# Altium PCB BreakoutBoard.PcbDoc
Units mil, origin at the board's own origin, x right, y up, seen from the top; angles counter-clockwise.
Board outline 1880 x 1880 mil, 2 copper layers (Top Layer, Bottom Layer), stack 61.811 mil thick; 15 components, 19 nets, 70 pads, 7 vias.
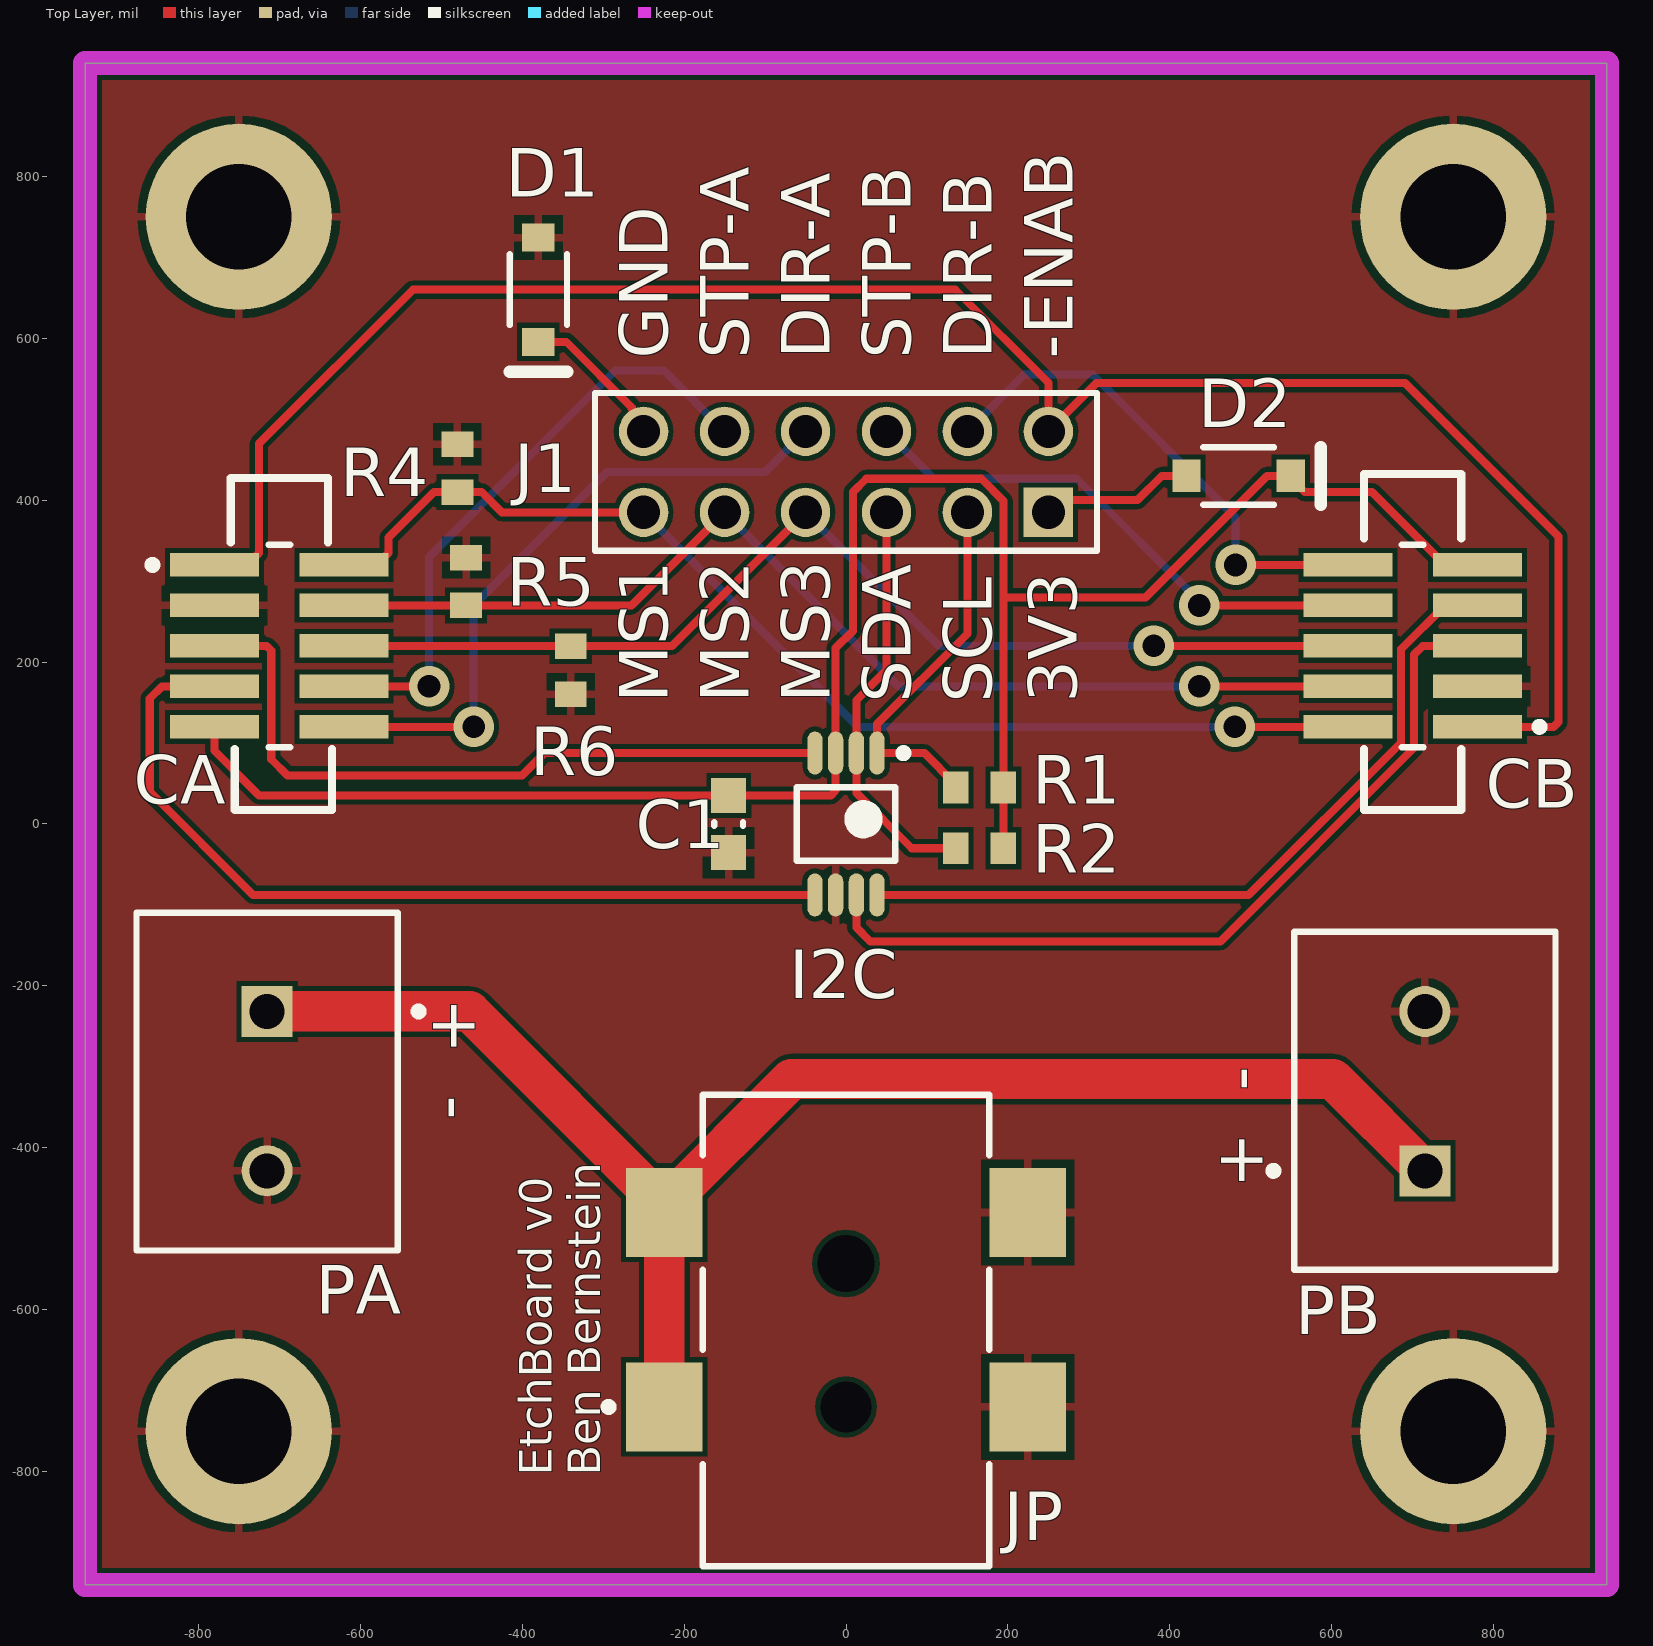
[diagram p0: Top Layer view]
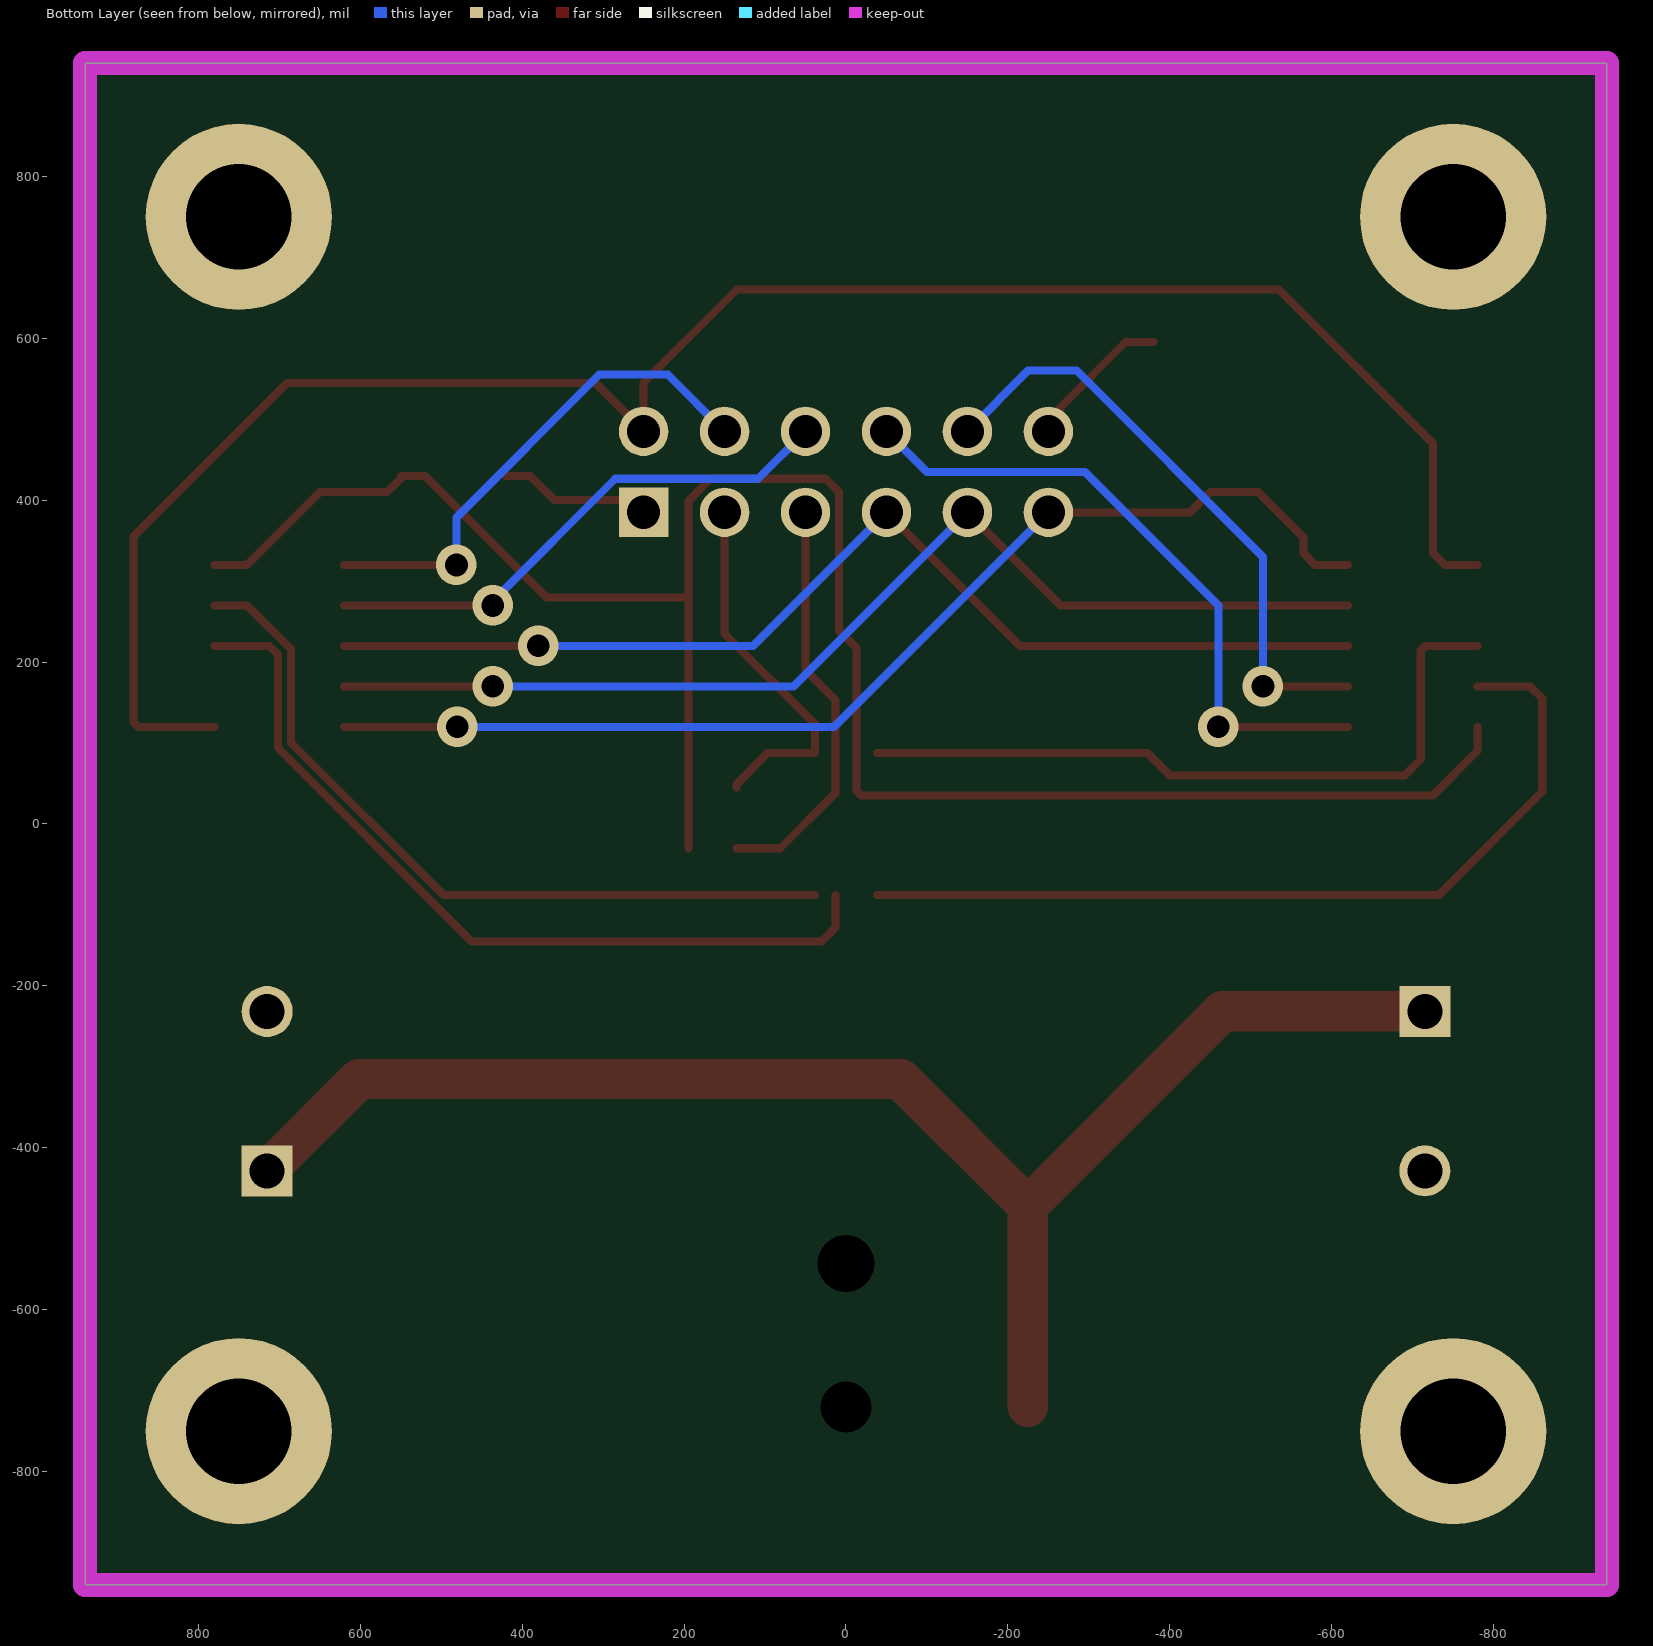
[diagram p1: Bottom Layer view, seen from below]

## Layer stack, top to bottom
Top Solder: solder mask 0.3937, Solder Resist, Dk 3.5
Top Layer: signal copper 1.378
Dielectric 1: dielectric 59.0551, FR-4, Dk 4.8
Bottom Layer: signal copper 1.378
Bottom Solder: solder mask 0.3937, Solder Resist, Dk 3.5

## Board outline
-940,-940 -940,940 940,940 940,-940

## Design rules (kind name [scope] priority, off if disabled: settings)
AcuteAngle [All] p1: minimum=6.00000000000000E+0001 checktracksonly=FALSE
AssemblyTestPointUsage [All] p1: allowmultiple=TRUE
AssemblyTestpoint [All] p1: testpointundercomponent=TRUE minsize=30 maxsize=100 preferedsize=60 minholesize=0 maxholesize=40 preferedholesize=32 testpointgrid=1 usegrid=FALSE gridtolerance=0.01 allowsidebottom=TRUE
BoardOutlineClearance [All] p1: gap=10 ignorepadtopadclearanceinfootprint=FALSE except(100: SMDPad-OutlineEdge SMDPad-CavityEdge SMDPad-CutoutEdge THPad-OutlineEdge THPad-CavityEdge THPad-CutoutEdge)
Clearance [All] p1: gap=6 ignorepadtopadclearanceinfootprint=FALSE except(120: SMDPad-THPad)
FabricationTestPointUsage [All] p1: valid=0 allowmultiple=TRUE
FabricationTestpoint [All] p1: side=2 testpointundercomponent=TRUE minsize=30 maxsize=100 preferedsize=60 minholesize=0 maxholesize=40 preferedholesize=32 testpointgrid=1 allowsidebottom=TRUE usegrid=FALSE gridtolerance=0.01
HoleSize [All] p1: absolutevalues=TRUE maxlimit=100 minlimit=8 maxpercent=80.000 minpercent=20.000
MinimumAnnularRing [All] p1: minimumring=6
MinimumSolderMaskSliver [All] p1: minsoldermaskwidth=4
PlaneClearance [All] p1: clearance=10
PolygonConnect [All] p1: connectstyle=Relief reliefconductorwidth=10 reliefentries=4 polygonreliefangle="90 Angle" airgapwidth=10
RoomDefinition BreakoutBoard [InComponentClass('BreakoutBoard')] p1: confinementstyle=ConfineIn formatcopy=TRUE lockcomponents=FALSE outline -1010,-1015 1005,-1015 1005,1045 -1010,1045
RoutingVias [All] p1: holewidth=16 width=30 viastyle="Through Hole" minholewidth=8 minwidth=20 maxholewidth=30 maxwidth=50
SMDEntry [All] p1: side=TRUE corner=TRUE anyangle=FALSE
SMDNeckDown [All] p1: percent=75.000
SMDToCorner [All] p1: distance=0
SMDToPlane [All] p1: distance=0
SilkToSilkClearance [All] p1: silktosilkclearance=0
SilkToSolderMaskClearance [IsPad] p1: minsilkscreentomaskgap=0 clearancetoexposedcopper=TRUE
SolderMaskExpansion [All] p1: expansion=4 istentingtop=FALSE
UnRoutedNet [All] p1: checkbadconnections=TRUE
Width [All] p1: maxlimit=1000 minlimit=6 preferedwidth=10
20 further rules are at their usual default settings.

## Components (designator, comment, footprint, x,y, rotation, side; value= is the part's Value field where it differs from the comment)
C1 "CAP 100nF 10V 0603(1608)" CAPC0603(1608)100_M -145,0 r270 top value=100nF
CA "FTSH-105-01-F-DV-K" SMTC-FTSH-105-01-L-DV-K_V -700,220 r270 top
CB "FTSH-105-01-F-DV-K" SMTC-FTSH-105-01-L-DV-K_V 700,220 r90 top
D1 "MBR0540" FAIR-SOD123-2_V -380,660 r270 top
D2 "MBR0540" FAIR-SOD123-2_V 485,430 r0 top
I2C "PCA9540BDP,118" TSOP65P490X110-8N 0,0 r270 top
J1 "SSW-106-01-T-D" SMTC-SSW-106-01-X-D 250,385 r180 top
JP "PJ-002BH-SMT-TR" CUI-PJ-002BH-SMT_V 0,-600 r90 top
PA "282836-2" TECO-282836-2_V -715,-330 r270 top
PB "282836-2" TECO-282836-2_V 715,-330 r90 top
R1 "RC0603FR-07100KL" RESC1608X55X25ML10T15 165,45 r180 top
R2 "RC0603FR-07100KL" RESC1608X55X25ML10T15 165,-30 r180 top
R4 "RC0603FR-07100KL" RESC1608X55X25ML10T15 -480,439.53 r270 top
R5 "RC0603FR-07100KL" RESC1608X55X25ML10T15 -469.25,299.53 r270 top
R6 "RC0603FR-07100KL" RESC1608X55X25ML10T15 -340,190 r90 top

## Footprints (in the part's own frame and the unit in brackets; to place one, negate y for a bottom-side part, rotate by r counter-clockwise, add the part's x,y. Pads: shape width x height; smd on the part's side, far side on the other; paste and mask are expansions set on the pad)
CAPC0603(1608)100_M [mm] "Chip Capacitor, Body 1.6x0.8mm, Height 1.0mm, IPC Low Density"
  rect 1.1x1.1 smd: 1(-0.9,0) 2(0.9,0)
  silkscreen extent -0.05,-0.45 0.05,0.45, body extent -0.87,-0.47 0.88,0.48, height 1
CUI-PJ-002BH-SMT_V [mm] "SMD, 3-Leads, Body 9x14.8mm, Pitch 6.1mm"
  rect 2.8x2.4 smd: 1(-3.05,5.7) 1(3.05,5.7) 2(-3.05,-5.7) 3(3.05,-5.7)
  round 0 hole 1.6 unplated: MH1(-3.05,0)
  round 0 hole 1.8 unplated: MH2(1.45,0)
  silkscreen extent -8.05,-4.5 6.75,7.57, body extent -8.05,-6.3 6.75,6.3, height 11.2
FAIR-SOD123-2_V [mm] "SOD123, 2-Leads, Body 1.80x2.85mm"
  rect 0.88x1.02 smd: 1(-1.635,0) 2(1.635,0)
  silkscreen extent -1.11,-0.9 2.58,0.9, body extent -1.43,-0.9 1.42,0.9, height 1.28
RESC1608X55X25ML10T15 [mm] "Chip Resistor, 2-Leads, Body 1.60x0.80mm, IPC Low Density"
  rect 0.8x1 smd: 1(-0.75,0) 2(0.75,0)
  body extent -0.85,-0.45 0.85,0.45, height 0.55
SMTC-FTSH-105-01-L-DV-K_V [mm] "CONN, 10-Leads, Body 6.35x3.43mm, Pitch 1.27mm"
  rect 0.74x2.79 smd: 1(-2.54,-2.035) 2(-2.54,2.035) 3(-1.27,-2.035) 4(-1.27,2.035) 5(0,-2.035) 6(0,2.035) 7(1.27,-2.035) 8(1.27,2.035) 9(2.54,-2.035) 10(2.54,2.035)
  silkscreen extent -3.17,-4.1 3.17,0.34, body extent -3.17,-2.92 3.18,2.92, height 6.12
SMTC-SSW-106-01-X-D [mm] "SQ Post Socket, 2x6 Pins, Vertical, 2.54mm Pitch, Female"
  rect 1.55x1.55 hole 1.04: 1(0,0)
  round 1.55 hole 1.04: 2(0,-2.54) 3(2.54,0) 4(2.54,-2.54) 5(5.08,0) 6(5.08,-2.54) 7(7.62,0) 8(7.62,-2.54) 9(10.16,0) 10(10.16,-2.54) 11(12.7,0) 12(12.7,-2.54)
  silkscreen extent -1.53,-3.74 14.23,1.2, body extent -1.52,-3.75 14.22,1.21, height 8.51
TECO-282836-2_V [mm] "Female Header, Pitch 5mm, 1 x 2 Position, Height 10mm"
  rect 1.6x1.6 hole 1.1: 1(-2.5,0)
  round 1.6 hole 1.1: 2(2.5,0)
  silkscreen extent -5.6,-4.1 5,4.88, body extent -5.6,-4.1 5,4.1, height 10
TSOP65P490X110-8N [mm] "TSOP, 8-Leads, Body 3.00x3.00mm, Pitch 0.65mm, IPC Medium Density"
  oval 1.35x0.48 smd: 1(-2.225,0.975) 2(-2.225,0.325) 3(-2.225,-0.325) 4(-2.225,-0.975) 5(2.225,-0.975) 6(2.225,-0.325) 7(2.225,0.325) 8(2.225,0.975)
  silkscreen extent -2.35,-1.55 1.15,1.92, body extent -1.55,-1.55 1.55,1.55, height 1.1

## Part data
C1: library part CMP-1035-02580-1, "CAP 100nF 10V ±10% 0603 (1608 Metric) Thickness 1mm SMD", Case-EIA=0603, Case-Metric=1608, Rated Voltage="10 V", Tolerance=Â±10%, Max Thickness="1 mm", Technology=SMT
CA CB: library part CMP-2000-05352-1, "Male Header, Pitch 1.27 mm, 2 x 5 Position, Height 6.12 mm, RoHS, Tube", Color=Black, Manufacturer=Samtec, Package Description="Male Header, Pitch 1.27 mm, 2 x 5 Position, Height 5.97 mm, Tail Length 4.32 mm", Package Reference=FTSH-105-01-L-DV-K, Category=Connectors,Interconnects, Connector Type=Header,Shrouded, Contact Finish=Gold, Contact Finish Thickness=3µin(0.08µm), Contact Mating Length="0.120\"(3.05mm)", Contact Type=MalePin, Datasheet URL=http://suddendocs.samtec.com/prints/ftsh-1xx-xx-xxx-dv-xxx-mkt.pdf, Datasheet Version="Rev. ET, 10/1995", Family=RectangularConnectors-Headers,MalePins, Fastening Type=-, Features=-, Manufacturer URL=http://www.samtec.com/, Mounting Type=SurfaceMount, Number of Positions=10, Number of Positions Loaded=All, Number of Rows=2, Package URL=http://suddendocs.samtec.com/prints/ftsh-1xx-xx-xxx-dv-xxx-footprint.pdf, Packaging=Tube, Pitch="0.050\"(1.27mm)", Row Spacing="0.050\"(1.27mm)", Series=FTSH, System=Connector, Termination=Solder
D1 D2: library part CMP-2000-05114-1, "Schottky Rectifier, 40 V, 0.5 A, 2-Pin SOD-123, RoHS, Tape and Reel", Capacitance @ Vr, F=-, Current - Average Rectified (Io)=500mA, Current - Reverse Leakage @ Vr=20µA@40V, Manufacturer=Fairchild, Operating Temperature - Junction=-65degC~125degC, Package / Case=SOD-123, Standard Package=1, Voltage - DC Reverse (Vr) (Max)=40V, Voltage - Forward (Vf) (Max) @ If=510mV@500mA, Category=DiscreteSemiconductorProducts, Datasheet URL=https://datasheet.ciiva.com/8303/mbr0540-8303808.pdf, Datasheet Version="Rev. 1.1.0, 10/2014", Diode Type=Schottky, Family=Diodes,Rectifiers-Single, Manufacturer URL=https://www.fairchildsemi.com/, Mounting Type=SurfaceMount, Online Catalog=SchottkyDiode, Other Names=MBR0540CT, Packaging=CutTape(CT), Reverse Recovery Time (trr)=-, Series=-, Speed=FastRecovery=200mA(Io), Supplier Device Package=SOD-123
I2C: library part CMP-00893-4, "IC I2C MUX 2CH 8-TSSOP", Case/Package=TSSOP, Max Frequency=400kHz, Max Operating Temperature=85°C, Max Power Dissipation=400mW, Max Supply Voltage=5.5V, Min Operating Temperature=-40°C, Min Supply Voltage=2.3V, Nominal Supply Current=100mA, On-State Resistance=55R, Package Quantity=1, Quiescent Current=65uA, Contact Plating=Gold, Height=0.95mm, Interface=I2C, Lead Free="Lead Free", Length=3.1mm, Logic Function=Multiplexer, Mount="Surface Mount", Number of Channels=2, Number of Circuits=2, Number of Input Lines=1, Number of Inputs=2, Number of Output Lines=2, Number of Outputs=1, Number of Pins=8, Packaging="Tape and Reel", Power Dissipation=400mW, Propagation Delay=0.3ns, Radiation Hardening=No, Width=3.1mm
J1: library part CMP-1023-00356-1, "SQ Post Socket, Through-hole, Vertical, -55 to 105 degC, 2.54mm Pitch, 12-Pin, Female, RoHS", Manufacturer=Samtec, Temperature Range="-55 to 105 degC", ComponentLink1Description="Manufacturer URL", ComponentLink1URL=http://www.samtec.com, ComponentLink2Description=Datasheet, ComponentLink2URL=http://www.samtec.com/documents/webfiles/pdf/SSW_TH.PDF, ComponentLink3Description="Package Specification", ComponentLink3URL=http://www.samtec.com/documents/webfiles/cpdf/SSW-1XX-XX-XXX-X-XX-XXX-XX-MKT.pdf, DatasheetVersion=F-214, Mounting Technology=Through-hole, Orientation=Vertical, PackageDescription="Assembly, Socket Strip .016 X .031 Tail", PackageReference=SSW-106-01-X-D, PackageVersion="CA, 6/1987", PartNumber=SSW-106-01-T-D, Pitch="2.54 mm", RoHS=True
JP: library part CMP-2000-06897-1, "DC Power Jack, 24 V, -25 to 85 degC, 3-Pin SMD, RoHS, Bulk", Current Rating=5A, Flammability Rating=UL94V-0, Insulation Resistance=100MOhms, Manufacturer=CUIInc., Operating Temperature Range=-25Cto+85C, Package Description="3-Pin Surface Mount Device, Body 9 x 14.8 mm, Pitch 6.1 mm", Package Reference=PJ-002BH-SMT, Voltage Rating=24V, Brand=CUI, Connector Type=DCPowerJack, Contact Gender=Male, Contact Material=Brass, Contact Plating=Nickel, Datasheet URL=http://www.cui.com/product/resource/pj-002bh-smt.pdf, Datasheet Version="Rev. 1.05, 05/2016", Factory Pack Quantity=350, Housing Material=Polyamide(PA), Inside Contact Diameter=2.5mm, Manufacturer URL=http://www.cui.com/, Mounting Angle=Right, Mounting Style=SMD/SMT, Mounting Technology=SurfaceMount, Outside Contact Diameter=6.5mm, Packaging=Reel, Product=Jacks, Product Category=DCPowerConnectors, RoHS=True, Termination Style=SMD/SMT
PA PB: library part CMP-1684-00017-1, "Female Header, Pitch 5 mm, 1 x 2 Position, Height 10 mm, Tail Length 3.5 mm, Rohs, Bulk", Color=Green, Current=13.5A, Manufacturer="TE Connectivity", Package Description="Female Header, Pitch 5 mm, 1 x 2 Position, Height 10 mm, Tail Length 3.5 mm", Package Reference=THD, Standard Package=300, Voltage=300V, 3D Model=282836-2.pdf, Category=Connectors,Interconnects, Clamp Material - Plating=Brass-NickelPlated, Contact Material - Plating=Brass-TinPlated, Datasheet URL=http://www.te.com.cn/commerce/DocumentDelivery/DDEController?Action=showdoc&DocId=Catalog+Section%7F1308389_EUROSTYLE_TERMINAL_BLOCKS%7F0607%7Fpdf%7FEnglish%7FENG_CS_1308389_EUROSTYLE_TERMINAL_BLOCKS_0607.pdf%7F282836-2, Dynamic Catalog=BuchananSeries, Family=TerminalBlocks-WiretoBoard, Featured Product=EurostyleTerminalBlockConnectors, Features=Interlocking(Side), Housing Material=Polyamide(PA66),Nylon6/6, Manufacturer URL=http://www.te.com, Mating Orientation=HorizontalwithBoard, Mounting Type=ThroughHole, Number of Levels=1, Other Names="5ULV-02B / A98076", Packaging=Bulk, Pitch="0.197\"(5.00mm)", Positions Per Level=2, Product Training Modules=Wire-to-BoardEurostyleTerminalBlocks, RoHS Information=282836-2StatementofCompliance, Screw Material - Plating=Brass-NickelPlated, Screw Thread=M3, Series=Buchanan, System=Connector, Torque - Screw=0.68Nm(6Lb-In), Wire Gauge=16-30AWG, Wire Termination=Screw-RisingCageClamp
R1 R2 R4 R5 R6: library part CMP-2100-03662-1, "Chip Resistor, 100 KOhm, +/- 1%, 0.1 W, -55 to 155 degC, 0603 (1608 Metric), RoHS, Tape and Reel", Case Code (Imperial)=0603, Case Code (Metric)=1608, Manufacturer=Yageo, Max Operating Temperature=155degC, Min Operating Temperature=-55degC, Package Description="2-Pin Surface Mount Device, Body 1.6 x 0.8 mm", Power Rating=100mW, Resistance=100KOhm, Temperature Coefficient=100ppm/degreesC, Tolerance=1%, Voltage Rating=50V, Case/Package=0603, Composition=ThickFilm, Datasheet URL=http://www.yageo.com/NewPortal/yageodocoutput?fileName=/pdf/R-Chip/PYu-RC_Group_51_RoHS_L_5.pdf, Datasheet Version="Rev. 5, 10/2016", Depth=0.8mm, Height=0.45mm, Lead Free=LeadFree, Length=1.6mm, Manufacturer URL=http://www.yageo.com/, Military Standard=Not, Number of Pins=2, Package Reference=0603, Packaging=TapeandReel, REACH SVHC=NoSVHC, RoHSCompliant=true, Termination=SMD/SMT, Voltage Rating (DC)=50V, Width=0.8mm

## Free pads (board coordinates)
  round 230 hole 130: 25(-750,-750) 25(-750,750) 25(750,-750) 25(750,750)

## Via types
v1: diameter 50, hole 28, Top Layer to Bottom Layer, 7 vias

## Nets (pads, with @x,y where several pads share a name; then routed paths per layer and width w, separated by ;. In a path a pad name is that pad's centre, name@x,y a point inside that pad or via, vN(x,y) a via of type N, cw(c..) or ccw(c..) an arc to the next point about the centre after c; other vN are vias at no path point)
3V3: C1.1 CA.9 CB.9 D2.2 I2C.3 R1.1 R2.1 | length 2525.1
  Top Layer w10: CA.9 -780.12,90.43 -725.12,35.43 -18.65,35.43 -12.8,41.29 -12.8,217.28 8.49,238.56 8.49,410 25,426.51 167.19,426.51 194.53,399.18 194.53,280 ; R2.1 R1.1 194.53,280 ; D2.2@549.37,427.24 566.69,409.92 649.84,409.92 739.76,320 CB.9 ; D2.2 520,430 370,280 194.53,280
-ENABLE: CA.1 CB.1 J1.2 | length 2421.1
  Top Layer w10: CA.1 -739.76,320 -725.2,334.57 -725.2,469.8 -535,660 135,660 250,545 J1.2 ; J1.2@250.94,485.94 309.53,544.53 625,544.53 690.47,544.53 880,355 880,125.86 874.14,120 CB.1
DIR-A: CA.10 J1.8 | length 808.9
  Top Layer w10: CA.10 v1(-460,120)
  Bottom Layer w10: v1(-460,120) -460,270 -295,435 -100,435 J1.8
DIR-B: CB.10 J1.4 | length 630.7
  Top Layer w10: v1(481.22,320) CB.10
  Bottom Layer w10: J1.4 220,555 305,555 481.22,378.78 v1(481.22,320)
GND: C1.2 CA.3 CB.3 D1.1 I2C.6 JP.2 JP.3 PA.2 pad.25 PB.2 R4.1 R5.1 R6.1
MS1: CA.2 CB.2 J1.11 R4.2 | length 1408.5
  Top Layer w10: CA.2 -579.53,320 -564.96,334.57 -564.96,353.87 -508.83,410 R4.2 -450,410 -425,385 J1.11 ; v1(480,120) CB.2
  Bottom Layer w10: J1.11 15,120 v1(480,120)
MS2: CA.4 CB.4 J1.9 R5.2 | length 1376.5
  Top Layer w10: CA.4 R5.2 -265,270 J1.9 ; v1(436.22,170) CB.4
  Bottom Layer w10: J1.9 65,170 v1(436.22,170)
MS3: CA.6 CB.6 J1.7 R6.2 | length 1376.5
  Top Layer w10: CA.6 -215,220 J1.7 ; v1(380,220) CB.6
  Bottom Layer w10: J1.7 115,220 v1(380,220)
PI3V3: D2.1 J1.1 | length 189.3
  Top Layer w10: J1.1 265,400 360,400 390,430 D2.1
PIGND: D1.2 J1.12 | length 184.6
  Top Layer w10: D1.2 -345.63,595.63 -264.68,514.68 -264.68,513.49 -250,498.81 J1.12
SCL: I2C.1 J1.3 R1.2 | length 460.7
  Top Layer w10: R1.2 135.47,48.94 96.81,87.6 I2C.1 38.39,123.39 150,235 J1.3
SCL-A: CA.7 I2C.5 | length 1075.6
  Top Layer w10: CA.7 -845,170 -860,155 -860,40 -732.4,-87.6 I2C.5
SCL-B: CB.7 I2C.8 | length 957.3
  Top Layer w10: I2C.8 497.33,-87.6 685.8,100.88 685.8,216.04 739.76,270 CB.7
SDA: I2C.2 J1.5 R2.2 | length 513
  Top Layer w10: J1.5 50,190 12.8,152.8 I2C.2 12.8,38.39 81.18,-30 R2.2
SDA-A: CA.5 I2C.4 | length 898
  Top Layer w10: CA.5 -715.86,220 -710,214.14 -710,80 -690,60 -400,60 -372.4,87.6 I2C.4
SDA-B: CB.5 I2C.7 | length 1033.3
  Top Layer w10: I2C.7 12.8,-127.79 30,-145 462.55,-145 701.8,94.25 701.8,209.41 712.39,220 CB.5
STEP-A: CA.8 J1.10 | length 756.2
  Top Layer w10: CA.8 v1(-515,170)
  Bottom Layer w10: v1(-515,170) -515,330 -285,560 -225,560 J1.10
STEP-B: CB.8 J1.6 | length 662.1
  Top Layer w10: v1(436.22,270) CB.8
  Bottom Layer w10: J1.6 108.49,426.51 285.07,426.51 436.22,275.36 v1(436.22,270)
VMOT: JP.1 PA.1 PB.1 | length 1889.7
  Top Layer w50: PA.1 -464.88,-231.57 JP.1@-224.41,-472.05 ; JP.1@-224.41,-720.08 -224.41,-479.92 JP.1@-224.41,-472.05 ; PB.1 601.57,-315 -67.36,-315 JP.1@-224.41,-472.05
pads on no net: JP.MH1 JP.MH2

## Polygon pours and split planes (outlines as drawn)
GND on Top Layer "GND_L01_P001" (solid, pour order 1): -940,-940 -940,940 940,940 940,-940

## Keep-outs
Keep-Out Layer:
  the board outline again, w30

## Silkscreen, mask and mechanical layers (free items; w line width, h text height)
Top Overlay:
  lines w10: -760,347.5 -760,427.5 -640,427.5 -640,347.5 ; -755,92.5 -755,17.5 -635,17.5 -635,92.5 ; 640,92.5 640,17.5 760,17.5 760,92.5 ; 640,352.5 640,432.5 760,432.5 760,352.5
  text "GND" at -220,575 h60 r90
  text "STP-A" at -120,575 h60 r90
  text "DIR-A" at -20,575 h60 r90
  text "STP-B" at 80,575 h60 r90
  text "DIR-B" at 180,575 h60 r90
  text "-ENAB" at 280,575 h60 r90
  text "MS1" at -220,150 h60 r90
  text "MS2" at -120,150 h60 r90
  text "MS3" at -20,150 h60 r90
  text "SDA" at 80,150 h60 r90
  text "SCL" at 180,150 h60 r90
  text "3V3" at 285,150 h60 r90
  text "+  -" at -510,-215 h60 r270
  text "+  -" at 515,-450 h60 r90
  text "EtchBoard v0 / Ben Bernstein" at -303.51,-805 h40 r90